# Altium PCB PCB2.PcbDoc
Units mil, origin at the board's own origin, x right, y up, seen from the top; angles counter-clockwise.
Board outline 6000 x 4000 mil, 2 copper layers (Top Layer, Bottom Layer); 176 components, 124 nets, 684 pads, 8 vias.
Unrouted connection lines stored in the file: 465.
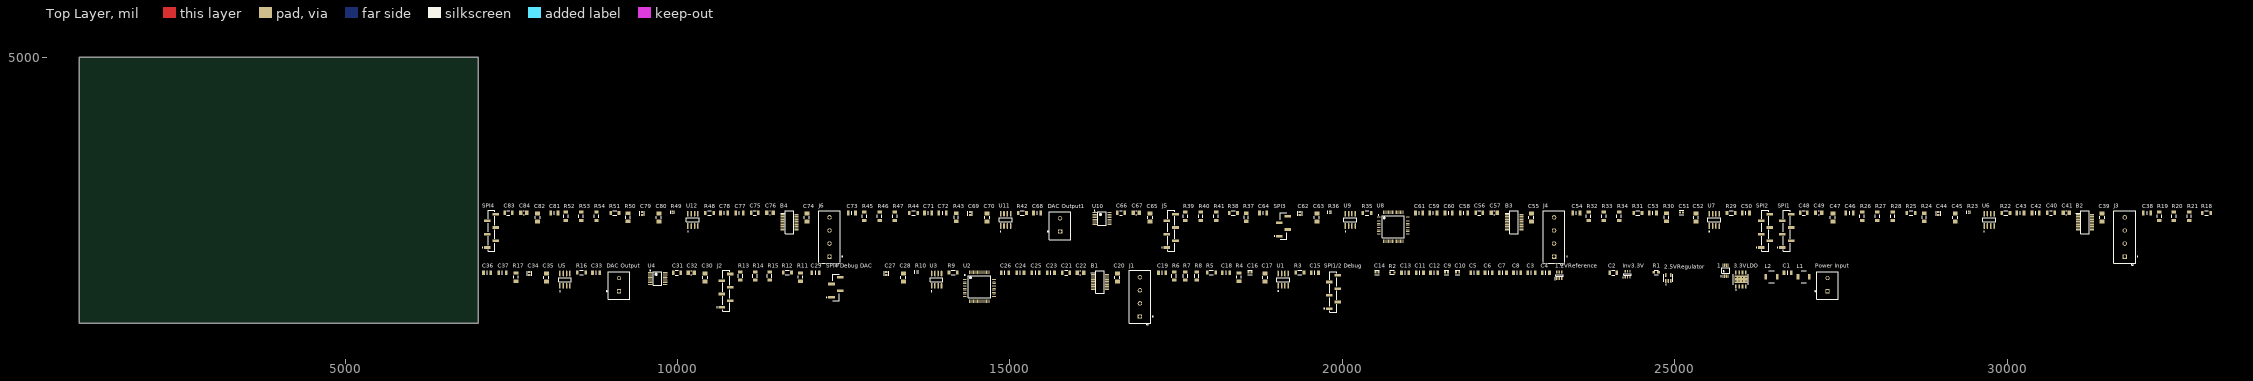
[diagram p0: Top Layer view]
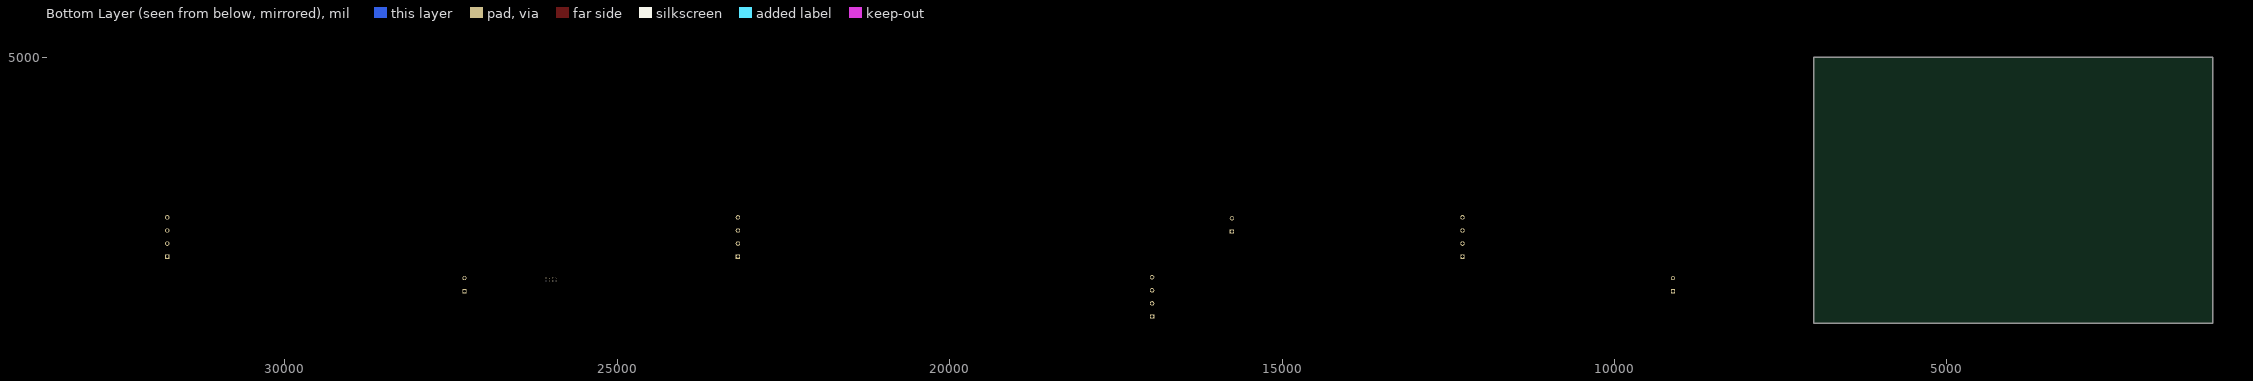
[diagram p1: Bottom Layer view, seen from below]

## Layer stack, top to bottom
Top Solder: solder mask 0.4, Solder Resist, Dk 3.5
Top Layer: signal copper 1.4
Dielectric 1: dielectric 12.6, FR-4, Dk 4.8
Bottom Layer: signal copper 1.4
Bottom Solder: solder mask 0.4, Solder Resist, Dk 3.5

## Board outline
1000,1000 7000,1000 7000,5000 1000,5000

## Design rules (kind name [scope] priority, off if disabled: settings)
Clearance [All] p1: gap=10 ignorepadtopadclearanceinfootprint=FALSE
PolygonConnect [All] p1: connectstyle=Relief reliefconductorwidth=10 reliefentries=4 polygonreliefangle="90 Angle" airgapwidth=10
RoutingVias [All] p1: holewidth=28 width=50 viastyle="Through Hole" minholewidth=28 minwidth=50 maxholewidth=28 maxwidth=50
SolderMaskExpansion [All] p1: expansion=4 istentingtop=FALSE
Width [All] p1: maxlimit=10 minlimit=10 preferedwidth=10
30 further rules are at their usual default settings.

## Components (designator, comment, footprint, x,y, rotation, side; value= is the part's Value field where it differs from the comment)
1 "LT1762EMS8-5#TRPBF" LT-MS8_L 25765,1790 r90 top
1.2VReference "REF35120QDBVR" SOT95P280X145-6N 23265,1720 r90 top
2.5VRegulator "ADP7142AUJZ-2.5-R7" FP-UJ-5-IPC_B 24905,1680 r90 top
3.3VLDO "TPS7B8633QDDARQ1" FP-DDA0008B-MFG 25995,1660 r90 top
B1 "AD7903BRQZ" SOP64P600X175-20N 16355,1620 r0 top
B2 "AD7903BRQZ" SOP64P600X175-20N 31170,2520 r0 top
B3 "AD7903BRQZ" SOP64P600X175-20N 22585,2520 r0 top
B4 "AD7903BRQZ" SOP64P600X175-20N 11685,2520 r0 top
C1 "1uF" CAPC3216X178N 26700,1760 r0 top
C2 "22pF" FP-C1206C-EB-MFG 24075,1760 r0 top value="22 pF"
C3 "10uF" CAPC3216X229N 22845,1760 r0 top
C4 "10uF" CAPC3216X229N 23060,1760 r0 top
C5 "10uF" CAPC3216X229N 21985,1760 r0 top
C6 "10uF" CAPC3216X229N 22200,1760 r0 top
C7 "1uF" CAPC3216X178N 22415,1760 r0 top
C8 "10uF" CAPC3216X229N 22630,1760 r0 top
C9 "0.01uF" FP-C0603C-CF-MFG 21565,1765 r0 top value="0.10 μF"
C10 "0.1uf" FP-C0603C-CF-MFG 21735,1765 r0 top value="0.10 μF"
C11 "10uF" CAPC3216X229N 21165,1760 r0 top
C12 "10uF" CAPC3216X229N 21380,1760 r0 top
C13 "1uF" CAPC3216X178N 20945,1760 r0 top
C14 "0.01uF" FP-C0603C-CF-MFG 20520,1765 r0 top value="0.10 μF"
C15 "10uF" CAPC3216X229N 19585,1760 r0 top
C16 "0.01uF" FP-C0603C-CF-MFG 18610,1765 r0 top value="0.10 μF"
C17 "2.7nF" FP-1206-L_3_2_0_2-W_1_6_0-IPC_A 18840,1690 r90 top
C18 "10uF" CAPC3216X229N 18250,1760 r0 top
C19 "10uF" CAPC3216X229N 17290,1760 r0 top
C20 "2.7nF" FP-1206-L_3_2_0_2-W_1_6_0-IPC_A 16615,1690 r90 top
C21 "3.9nF" FP-C1206C-EB-MFG 15845,1760 r0 top value="3,900 pF"
C22 "560pF" FP-GCM31B-0_2-IPC_C 16060,1760 r0 top
C23 "10uF" CAPC3216X229N 15615,1760 r0 top
C24 "10uF" CAPC3216X229N 15155,1760 r0 top
C25 "10uF" CAPC3216X229N 15385,1760 r0 top
C26 "10uF" CAPC3216X229N 14925,1760 r0 top
C27 "0.01uF" FP-C0603C-CF-MFG 13140,1750 r90 top value="0.10 μF"
C28 "2.7nF" FP-1206-L_3_2_0_2-W_1_6_0-IPC_A 13395,1690 r90 top
C29 "10uF" CAPC3216X229N 12075,1760 r0 top
C30 "2.7nF" FP-1206-L_3_2_0_2-W_1_6_0-IPC_A 10415,1690 r90 top
C31 "3.9nF" FP-C1206C-EB-MFG 9990,1760 r0 top value="3,900 pF"
C32 "560pF" FP-GCM31B-0_2-IPC_C 10205,1760 r0 top
C33 "10uF" CAPC3216X229N 8775,1760 r0 top
C34 "0.01uF" FP-C0603C-CF-MFG 7770,1750 r90 top value="0.10 μF"
C35 "2.7nF" FP-1206-L_3_2_0_2-W_1_6_0-IPC_A 8025,1690 r90 top
C36 "10uF" CAPC3216X229N 7135,1760 r0 top
C37 "10uF" CAPC3216X229N 7365,1760 r0 top
C38 "10uF" CAPC3216X229N 32105,2660 r0 top
C39 "2.7nF" FP-1206-L_3_2_0_2-W_1_6_0-IPC_A 31430,2590 r90 top
C40 "3.9nF" FP-C1206C-EB-MFG 30660,2660 r0 top value="3,900 pF"
C41 "560pF" FP-GCM31B-0_2-IPC_C 30890,2660 r0 top
C42 "10uF" CAPC3216X229N 30430,2660 r0 top
C43 "10uF" CAPC3216X229N 30200,2660 r0 top
C44 "0.01uF" FP-C0603C-CF-MFG 28965,2650 r90 top value="0.10 μF"
C45 "2.7nF" FP-1206-L_3_2_0_2-W_1_6_0-IPC_A 29220,2590 r90 top
C46 "10uF" CAPC3216X229N 27630,2660 r0 top
C47 "2.7nF" FP-1206-L_3_2_0_2-W_1_6_0-IPC_A 27380,2590 r90 top
C48 "3.9nF" FP-C1206C-EB-MFG 26940,2660 r0 top value="3,900 pF"
C49 "560pF" FP-GCM31B-0_2-IPC_C 27165,2660 r0 top
C50 "10uF" CAPC3216X229N 26070,2660 r0 top
C51 "0.01uF" FP-C0603C-CF-MFG 25100,2665 r0 top value="0.10 μF"
C52 "2.7nF" FP-1206-L_3_2_0_2-W_1_6_0-IPC_A 25320,2590 r90 top
C53 "10uF" CAPC3216X229N 24670,2660 r0 top
C54 "10uF" CAPC3216X229N 23520,2660 r0 top
C55 "2.7nF" FP-1206-L_3_2_0_2-W_1_6_0-IPC_A 22845,2590 r90 top
C56 "3.9nF" FP-C1206C-EB-MFG 22060,2660 r0 top value="3,900 pF"
C57 "560pF" FP-GCM31B-0_2-IPC_C 22285,2660 r0 top
C58 "10uF" CAPC3216X229N 21830,2660 r0 top
C59 "10uF" CAPC3216X229N 21370,2660 r0 top
C60 "10uF" CAPC3216X229N 21600,2660 r0 top
C61 "10uF" CAPC3216X229N 21155,2660 r0 top
C62 "0.01uF" FP-C0603C-CF-MFG 19360,2650 r90 top value="0.10 μF"
C63 "2.7nF" FP-1206-L_3_2_0_2-W_1_6_0-IPC_A 19615,2590 r90 top
C64 "10uF" CAPC3216X229N 18810,2660 r0 top
C65 "2.7nF" FP-1206-L_3_2_0_2-W_1_6_0-IPC_A 17110,2590 r90 top
C66 "3.9nF" FP-C1206C-EB-MFG 16670,2660 r0 top value="3,900 pF"
C67 "560pF" FP-GCM31B-0_2-IPC_C 16900,2660 r0 top
C68 "10uF" CAPC3216X229N 15410,2660 r0 top
C69 "0.01uF" FP-C0603C-CF-MFG 14400,2650 r90 top value="0.10 μF"
C70 "2.7nF" FP-1206-L_3_2_0_2-W_1_6_0-IPC_A 14655,2590 r90 top
C71 "10uF" CAPC3216X229N 13770,2660 r0 top
C72 "10uF" CAPC3216X229N 13985,2660 r0 top
C73 "10uF" CAPC3216X229N 12620,2660 r0 top
C74 "2.7nF" FP-1206-L_3_2_0_2-W_1_6_0-IPC_A 11945,2590 r90 top
C75 "3.9nF" FP-C1206C-EB-MFG 11160,2660 r0 top value="3,900 pF"
C76 "560pF" FP-GCM31B-0_2-IPC_C 11390,2660 r0 top
C77 "10uF" CAPC3216X229N 10930,2660 r0 top
C78 "10uF" CAPC3216X229N 10700,2660 r0 top
C79 "0.01uF" FP-C0603C-CF-MFG 9465,2650 r90 top value="0.10 μF"
C80 "2.7nF" FP-1206-L_3_2_0_2-W_1_6_0-IPC_A 9720,2590 r90 top
C81 "10uF" CAPC3216X229N 8145,2660 r0 top
C82 "2.7nF" FP-1206-L_3_2_0_2-W_1_6_0-IPC_A 7895,2590 r90 top
C83 "3.9nF" FP-C1206C-EB-MFG 7455,2660 r0 top value="3,900 pF"
C84 "560pF" FP-GCM31B-0_2-IPC_C 7685,2660 r0 top
"DAC Output" "282836-2" TECO-282836-2_V 9120,1580 r90 top
"DAC Output1" "282836-2" TECO-282836-2_V 15755,2480 r90 top
Inv3.3V "LT3462ES6#TRMPBF" LT-S6-6-TSOT-23_L 24290,1735 r90 top
J1 "282836-4" FP-282836-4-MFG 16955,1385 r90 top
J2 "M20-8770642R" FP-M20-8770642R-MFG 10730,1490 r90 top
J3 "282836-4" FP-282836-4-MFG 31770,2285 r90 top
J4 "282836-4" FP-282836-4-MFG 23185,2285 r90 top
J5 "M20-8770642R" FP-M20-8770642R-MFG 17425,2390 r90 top
J6 "282836-4" FP-282836-4-MFG 12285,2285 r90 top
L1 "22uH" FP-DEM4518C-MFG 26940,1700 r0 top
L2 "22uH" FP-DEM4518C-MFG 26455,1700 r0 top
"Power Input" "282836-2" TECO-282836-2_V 27300,1580 r90 top
R1 "267k" FP-RP731J-MFG 24720,1765 r0 top value=267KΩ
R2 "102k" FP-RT0603-MFG 20750,1765 r0 top value=102KΩ
R3 "33" FP-SR1206-MFG 19360,1760 r0 top value=33Ω
R4 "1.69k" RESC3216X60X45ML10T20 18445,1695 r90 top
R5 "33" FP-SR1206-MFG 18030,1760 r0 top value=33Ω
R6 "562" FP-RP732B-MFG 17470,1710 r90 top value=562Ω
R7 "562" FP-RP732B-MFG 17640,1710 r90 top value=562Ω
R8 "562" FP-RP732B-MFG 17810,1710 r90 top value=562Ω
R9 "33" FP-SR1206-MFG 14145,1760 r0 top value=33Ω
R10 "1 ohm precision" FP-AC0402-IPC_C 13595,1770 r90 top
R11 "1.69k" RESC3216X60X45ML10T20 11850,1695 r90 top
R12 "33" FP-SR1206-MFG 11650,1760 r0 top value=33Ω
R13 "562" FP-RP732B-MFG 10945,1710 r90 top value=562Ω
R14 "562" FP-RP732B-MFG 11165,1710 r90 top value=562Ω
R15 "562" FP-RP732B-MFG 11385,1710 r90 top value=562Ω
R16 "33" FP-SR1206-MFG 8555,1760 r0 top value=33Ω
R17 "1.69k" RESC3216X60X45ML10T20 7570,1695 r90 top
R18 "33" FP-SR1206-MFG 33000,2660 r0 top value=33Ω
R19 "562" FP-RP732B-MFG 32290,2610 r90 top value=562Ω
R20 "562" FP-RP732B-MFG 32510,2610 r90 top value=562Ω
R21 "562" FP-RP732B-MFG 32740,2610 r90 top value=562Ω
R22 "33" FP-SR1206-MFG 29980,2660 r0 top value=33Ω
R23 "1 ohm precision" FP-AC0402-IPC_C 29420,2670 r90 top
R24 "1.69k" RESC3216X60X45ML10T20 28755,2595 r90 top
R25 "33" FP-SR1206-MFG 28555,2660 r0 top value=33Ω
R26 "562" FP-RP732B-MFG 27820,2610 r90 top value=562Ω
R27 "562" FP-RP732B-MFG 28050,2610 r90 top value=562Ω
R28 "562" FP-RP732B-MFG 28280,2610 r90 top value=562Ω
R29 "33" FP-SR1206-MFG 25850,2660 r0 top value=33Ω
R30 "1.69k" RESC3216X60X45ML10T20 24875,2595 r90 top
R31 "33" FP-SR1206-MFG 24445,2660 r0 top value=33Ω
R32 "562" FP-RP732B-MFG 23705,2610 r90 top value=562Ω
R33 "562" FP-RP732B-MFG 23935,2610 r90 top value=562Ω
R34 "562" FP-RP732B-MFG 24165,2610 r90 top value=562Ω
R35 "33" FP-SR1206-MFG 20370,2660 r0 top value=33Ω
R36 "1 ohm precision" FP-AC0402-IPC_C 19810,2670 r90 top
R37 "1.69k" RESC3216X60X45ML10T20 18555,2595 r90 top
R38 "33" FP-SR1206-MFG 18360,2660 r0 top value=33Ω
R39 "562" FP-RP732B-MFG 17640,2610 r90 top value=562Ω
R40 "562" FP-RP732B-MFG 17870,2610 r90 top value=562Ω
R41 "562" FP-RP732B-MFG 18100,2610 r90 top value=562Ω
R42 "33" FP-SR1206-MFG 15185,2660 r0 top value=33Ω
R43 "1.69k" RESC3216X60X45ML10T20 14190,2595 r90 top
R44 "33" FP-SR1206-MFG 13550,2660 r0 top value=33Ω
R45 "562" FP-RP732B-MFG 12810,2610 r90 top value=562Ω
R46 "562" FP-RP732B-MFG 13040,2610 r90 top value=562Ω
R47 "562" FP-RP732B-MFG 13270,2610 r90 top value=562Ω
R48 "33" FP-SR1206-MFG 10480,2660 r0 top value=33Ω
R49 "1 ohm precision" FP-AC0402-IPC_C 9920,2670 r90 top
R50 "1.69k" RESC3216X60X45ML10T20 9255,2595 r90 top
R51 "33" FP-SR1206-MFG 9055,2660 r0 top value=33Ω
R52 "562" FP-RP732B-MFG 8320,2610 r90 top value=562Ω
R53 "562" FP-RP732B-MFG 8550,2610 r90 top value=562Ω
R54 "562" FP-RP732B-MFG 8780,2610 r90 top value=562Ω
SPI1 "M20-8770642R" FP-M20-8770642R-MFG 26685,2390 r90 top
"SPI1/2 Debug" "M20-8770642R" FP-M20-8770642R-MFG 19865,1470 r90 top
SPI2 "M20-8770642R" FP-M20-8770642R-MFG 26365,2390 r90 top
SPI3 "M20-8770446" M208770446 19115,2460 r90 top
SPI4 "M20-8770642R" FP-M20-8770642R-MFG 7200,2390 r90 top
"SPI4 Debug DAC" "M20-8770446" M208770446 12380,1540 r90 top
U1 "ADA4941-1YRZ-R7" FP-R-8-IPC_B 19110,1655 r90 top
U2 "PIC32MZ2048EFG064-I/PT" FP-C04-085-PT-IPC_C 14540,1550 r0 top
U3 "ADA4941-1YRZ-R7" FP-R-8-IPC_B 13895,1655 r90 top
U4 "AD5686RBRUZ" RU-16_N 9700,1675 r0 top
U5 "ADA4941-1YRZ-R7" FP-R-8-IPC_B 8305,1655 r90 top
U6 "ADA4941-1YRZ-R7" FP-R-8-IPC_B 29730,2555 r90 top
U7 "ADA4941-1YRZ-R7" FP-R-8-IPC_B 25595,2555 r90 top
U8 "PIC32MZ2048EFG064-I/PT" FP-C04-085-PT-IPC_C 20765,2450 r0 top
U9 "ADA4941-1YRZ-R7" FP-R-8-IPC_B 20120,2555 r90 top
U10 "AD5686RBRUZ" RU-16_N 16385,2575 r0 top
U11 "ADA4941-1YRZ-R7" FP-R-8-IPC_B 14935,2555 r90 top
U12 "ADA4941-1YRZ-R7" FP-R-8-IPC_B 10230,2555 r90 top

## Footprints (in the part's own frame and the unit in brackets; to place one, negate y for a bottom-side part, rotate by r counter-clockwise, add the part's x,y. Pads: shape width x height; smd on the part's side, far side on the other; paste and mask are expansions set on the pad)
CAPC3216X178N [mm]
  rect 1.02x1.82 smd: 1(-1.4,0) 2(1.4,0)
  silkscreen extent 0,-0.7 0,0.7
CAPC3216X229N [mm]
  rect 1.02x1.82 smd: 1(-1.4,0) 2(1.4,0)
  silkscreen extent 0,-0.7 0,0.7
FP-1206-L_3_2_0_2-W_1_6_0-IPC_A [mil]
  rect 59.24x75.05 smd paste+0 mask+0: 1(-59.09,0) 2(59.09,0)
  silkscreen extent -18,-38 18,38, body extent -108,-57 108,57, height 10
FP-282836-4-MFG [mm]
  rect 1.7x1.7 hole 1.1 paste-2539.97 mask+0: 1(-7.2,0)
  round 1.7 hole 1.1 paste-2539.97 mask+0: 2(-2.2,0) 3(2.8,0) 4(7.8,0)
  silkscreen extent -10.43,-5 10.43,4.18, body extent -10.52,-4.28 10.53,4.28, height 0.25
FP-AC0402-IPC_C [mil]
  rect 20.29x18.6 smd paste+0 mask+0: 1(-14.9,0) 2(14.9,0)
  silkscreen extent -25,-27 25,27, body extent -29,-15 29,15, height 10
FP-C04-085-PT-IPC_C [mm]
  rect 1.355x0.212 smd paste+0 mask+0: 1(-5.575,3.75)
  rrect100% 1.355x0.212 smd paste+0 mask+0: 2(-5.575,3.25) 3(-5.575,2.75) 4(-5.575,2.25) 5(-5.575,1.75) 6(-5.575,1.25) 7(-5.575,0.75) 8(-5.575,0.25) 9(-5.575,-0.25) 10(-5.575,-0.75) 11(-5.575,-1.25) 12(-5.575,-1.75) 13(-5.575,-2.25) 14(-5.575,-2.75) 15(-5.575,-3.25) 16(-5.575,-3.75) 33(5.575,-3.75) 34(5.575,-3.25) 35(5.575,-2.75) 36(5.575,-2.25) 37(5.575,-1.75) 38(5.575,-1.25) 39(5.575,-0.75) 40(5.575,-0.25) 41(5.575,0.25) 42(5.575,0.75) 43(5.575,1.25) 44(5.575,1.75) 45(5.575,2.25) 46(5.575,2.75) 47(5.575,3.25) 48(5.575,3.75)
  rrect100% 0.212x1.355 smd paste+0 mask+0: 17(-3.75,-5.575) 18(-3.25,-5.575) 19(-2.75,-5.575) 20(-2.25,-5.575) 21(-1.75,-5.575) 22(-1.25,-5.575) 23(-0.75,-5.575) 24(-0.25,-5.575) 25(0.25,-5.575) 26(0.75,-5.575) 27(1.25,-5.575) 28(1.75,-5.575) 29(2.25,-5.575) 30(2.75,-5.575) 31(3.25,-5.575) 32(3.75,-5.575) 49(3.75,5.575) 50(3.25,5.575) 51(2.75,5.575) 52(2.25,5.575) 53(1.75,5.575) 54(1.25,5.575) 55(0.75,5.575) 56(0.25,5.575) 57(-0.25,5.575) 58(-0.75,5.575) 59(-1.25,5.575) 60(-1.75,5.575) 61(-2.25,5.575) 62(-2.75,5.575) 63(-3.25,5.575) 64(-3.75,5.575)
  silkscreen extent -5.7,-4.25 4.25,4.58, body extent -6.35,-6.35 6.35,6.35, height 0.25
FP-C0603C-CF-MFG [mm]
  rect 0.75x0.9 smd paste+0 mask+0: 1(-0.6,0) 2(0.6,0)
  silkscreen extent -0.87,-0.85 0.88,0.85, body extent -1.2,-0.6 1.2,0.6, height 0.25
FP-C1206C-EB-MFG [mm]
  rect 0.95x1.7 smd paste+0 mask+0: 1(-1.4,0) 2(1.4,0)
  silkscreen extent -0.55,-0.9 0.55,0.9, body extent -2,-1 2,1, height 0.25
FP-DDA0008B-MFG [mm]
  rrect17% 1.55x0.6 smd paste+0 mask+0: 1(-2.7,1.905) 2(-2.7,0.635) 3(-2.7,-0.635) 4(-2.7,-1.905) 5(2.7,-1.905) 6(2.7,-0.635) 7(2.7,0.635) 8(2.7,1.905)
  rrect3% 2.95x4.9 smd paste-1000 mask-1000: 9(0,0)
  silkscreen extent -4.15,-2.83 2,2.83, body extent -3.57,-2.75 3.57,2.75, height 0.25
FP-DEM4518C-MFG [mm]
  rect 1x2.2 smd paste+0 mask+0: 1(-2.15,0) 2(2.15,0)
  silkscreen extent -1,-2.35 1,2.35, body extent -2.75,-2.45 2.75,2.45, height 0.25
FP-GCM31B-0_2-IPC_C [mil]
  rect 51.35x67.17 smd paste+0 mask+0: 1(-47.28,0) 2(47.28,0)
  silkscreen extent -7,-31 7,31, body extent -77,-39 77,39, height 10
FP-M20-8770642R-MFG [mm]
  rect 1x2.51 smd paste+0 mask+0: 1(-6.35,1.655) 2(-3.81,-1.655) 3(-1.27,1.655) 4(1.27,-1.655) 5(3.81,1.655) 6(6.35,-1.655)
  silkscreen extent -7.8,-1.33 7.8,3.6, body extent -7.9,-3.01 7.9,3.01, height 0.25
FP-R-8-IPC_B [mil]
  rect 85.59x22.92 smd paste+0 mask+0: 1(-93.15,75)
  rrect100% 85.59x22.92 smd paste+0 mask+0: 2(-93.15,25) 3(-93.15,-25) 4(-93.15,-75) 5(93.15,-75) 6(93.15,-25) 7(93.15,25) 8(93.15,75)
  silkscreen extent -178,-96 31,96, body extent -146,-106 146,106, height 10
FP-RP731J-MFG [mm]
  rect 1x0.9 smd paste+0 mask+0: 1(-0.9,0) 2(0.9,0)
  silkscreen extent -0.77,-0.82 0.77,0.82, body extent -1.5,-0.55 1.5,0.55, height 0.25
FP-RP732B-MFG [mm]
  rect 1.15x1.7 smd paste+0 mask+0: 1(-1.575,0) 2(1.575,0)
  silkscreen extent -0.63,-0.85 0.63,0.85, body extent -2.25,-0.95 2.25,0.95, height 0.25
FP-RT0603-MFG [mm]
  rect 0.9x0.8 smd paste+0 mask+0: 1(-0.85,0) 2(0.85,0)
  silkscreen extent -0.85,-0.81 0.86,0.8, body extent -1.4,-0.55 1.4,0.55, height 0.25
FP-SR1206-MFG [mm]
  rect 1x1.5 smd paste+0 mask+0: 1(-1.6,0) 2(1.6,0)
  silkscreen extent -0.72,-0.85 0.72,0.85, body extent -2.2,-0.95 2.2,0.95, height 0.25
FP-UJ-5-IPC_B [mm]
  rect 1.554x0.572 smd paste+0 mask+0: 1(-1.1,0.95)
  rrect100% 1.554x0.572 smd paste+0 mask+0: 2(-1.1,0) 3(-1.1,-0.95) 4(1.1,-0.95) 5(1.1,0.95)
  silkscreen extent -2.65,-1.7 1.4,1.7, body extent -2.13,-1.7 2.13,1.7, height 0.25
LT-MS8_L [mm] "SOP, 8-Leads, Body 3x3mm, Pitch 0.65mm, IPC High Density"
  oval 1.3x0.45 smd: 1(-2.1,0.975) 2(-2.1,0.325) 3(-2.1,-0.325) 4(-2.1,-0.975) 5(2.1,-0.975) 6(2.1,-0.325) 7(2.1,0.325) 8(2.1,0.975)
  silkscreen extent -2.22,-1.55 1.05,1.87, body extent -1.55,-1.55 1.55,1.55, height 1.1
LT-S6-6-TSOT-23_L [mm] "SOT23, 6-Leads, Body 2.9x1.75mm, Pitch 0.95mm, IPC High Density"
  rect 1x0.55 smd: 1(-1.15,0.95) 2(-1.15,0) 3(-1.15,-0.95) 4(1.15,-0.95) 5(1.15,0) 6(1.15,0.95)
  silkscreen extent -1.27,-1.45 0.25,1.9, body extent -0.87,-1.45 0.87,1.45, height 1
M208770446 [mm]
  rect 1x2.51 smd: 1(-3.81,1.655) 2(-1.27,-1.655) 3(1.27,1.655) 4(3.81,-1.655)
  silkscreen extent -5.08,-1.25 5.08,3.6
RESC3216X60X45ML10T20 [mm] "Chip Resistor, 2-Leads, Body 3.20x1.60mm, IPC Low Density"
  rect 1.3x1.8 smd: 1(-1.55,0) 2(1.55,0)
  silkscreen extent -0.5,-0.8 0.5,0.8, body extent -1.65,-0.85 1.65,0.85, height 0.6
RU-16_N [mm] "TSOP, 16-Leads, Body 5x4.4mm, Pitch 0.65mm, IPC Medium Density"
  oval 1.7x0.35 smd: 1(-2.85,2.275) 2(-2.85,1.625) 3(-2.85,0.975) 4(-2.85,0.325) 5(-2.85,-0.325) 6(-2.85,-0.975) 7(-2.85,-1.625) 8(-2.85,-2.275) 9(2.85,-2.275) 10(2.85,-1.625) 11(2.85,-0.975) 12(2.85,-0.325) 13(2.85,0.325) 14(2.85,0.975) 15(2.85,1.625) 16(2.85,2.275)
  silkscreen extent -2.97,-2.55 1.6,3.12, body extent -2.25,-2.55 2.25,2.55, height 1.2
SOP64P600X175-20N [mm]
  rect 1.52x0.44 smd: 1(-2.715,2.88) 2(-2.715,2.24) 3(-2.715,1.6) 4(-2.715,0.96) 5(-2.715,0.32) 6(-2.715,-0.32) 7(-2.715,-0.96) 8(-2.715,-1.6) 9(-2.715,-2.24) 10(-2.715,-2.88) 11(2.715,-2.88) 12(2.715,-2.24) 13(2.715,-1.6) 14(2.715,-0.96) 15(2.715,-0.32) 16(2.715,0.32) 17(2.715,0.96) 18(2.715,1.6) 19(2.715,2.24) 20(2.715,2.88)
  silkscreen extent -3.47,-4.33 1.61,4.33
SOT95P280X145-6N [mm]
  rect 1.2x0.6 smd: 1(-1.25,0.95) 2(-1.25,0) 3(-1.25,-0.95) 4(1.25,-0.95) 5(1.25,0) 6(1.25,0.95)
  silkscreen extent -1.85,-1.45 0.3,1.6
TECO-282836-2_V [mm] "Female Header, Pitch 5mm, 1 x 2 Position, Height 10mm"
  rect 1.6x1.6 hole 1.1: 1(-2.5,0)
  round 1.6 hole 1.1: 2(2.5,0)
  silkscreen extent -5.6,-4.1 5,4.87, body extent -5.6,-4.1 5,4.1, height 10

## Part data
1: library part CMP-0476-00706-1, "150 mA, Low Noise, LDO Micropower Regulator, 1.8 to 20 V Vin, 5 V Vout, 8-pin SOP (MS8-8), -40 to 125 degC, Pb-Free, Tape and Reel", Dropout Voltage(V)=0.27, Manufacturer="Linear Technology", Output Voltage="5 V", Shutdown Current(uA)=1, ComponentLink1Description="Manufacturer URL", ComponentLink1URL=http://www.linear.com/, ComponentLink2Description=Datasheet, ComponentLink2URL=http://cds.linear.com/docs/en/datasheet/1762fa.pdf, ComponentLink3Description="Package Specification", ComponentLink3URL=http://cds.linear.com/docs/en/packaging/05081660_G_MS8.pdf, DatasheetVersion="Rev. A", Discrete Pass Element=no, Iout(mA)=150, Isupply(mA)=0.025, Mounting Technology="Surface Mount", Noise(uV)=20, Number of Outputs=1, PackageDescription="8-Pin Plastic MSOP, Body 3 x 3 mm, Pitch 0.65 mm", PackageReference=MS8, PackageVersion="Rev. G, 05/2013", Packing="Tape and Reel", PartNumber=LT1762EMS8-5#TRPBF, PSRR(dB)=65, RoHS=TRUE, Vin Max(V)=20, Vin Min(V)=1.8
1.2VReference: "Voltage References 650-nA quiescent current, 12-ppm/C drift, ultra-low-power precision voltage reference", Manufacturer_Name="Texas Instruments", Mouser Part Number=595-REF35120QDBVR, Datasheet Link=https://www.ti.com/lit/ds/symlink/ref35.pdf?HQS=dis-mous-null-mousermode-dsf-pf-null-wwe&ts=1691289769260&ref_url=https%253A%252F%252Fwww.mouser.kr%252F, Geometry.Height=1.45mm, Manufacturer_Part_Number=REF35120QDBVR, Mouser Price/Stock=https://www.mouser.co.uk/ProductDetail/Texas-Instruments/REF35120QDBVR?qs=IPgv5n7u5QaqWPuhqB4rXA%3D%3D
2.5VRegulator: library part CMP-09138-000287-1, "IC REG LIN 2.5V 200MA TSOT23-5", Case/Package=SOT-23-5, Dropout Voltage=200mV, Input Bias Current=1uA, Max Input Voltage=40V, Max Operating Temperature=125°C, Max Output Current=200mA, Max Supply Current=320uA, Min Current Limit=250mA, Min Input Voltage=2.7V, Min Operating Temperature=-40°C, Min Output Voltage=2.5V, Operating Supply Current=180uA, Package Quantity=3000, Power Supply Rejection Ratio (PSRR)=88dB, Quiescent Current=140uA, Accuracy=0.8%, Contact Plating=Gold, Lead Free="Contains Lead", Mount="Surface Mount", Number of Outputs=1, Number of Pins=5, Number of Regulators=1, Output Configuration=Positive, Output Current=200mA, Output Type=Fixed, Output Voltage=2.5V, Packaging="Tape and Reel", Polarity=Positive, RoHS Compliant=Yes, Series=-
3.3VLDO: library part CMP-00370-110297362-1, "TPS7B8633QDDARQ1 Automotive 500-mA, 40-V, ultra-low-IQ, low-dropout (LDO) linear regulator with power good", Manufacturer Lifecycle Status=ACTIVE, Height=1.7mm, Length=4.89mm, Lifecycle Status=Production, NexarPartId=110297362, Number of Pins=8, Thickness=1.48mm, Width=3.9mm
B1 B2 B3 B4: "Analog Devices AD7903BRQZ, 16 bit Serial ADC, Dual Differential Input, 20-Pin QSOP", Manufacturer_Name="Analog Devices", Mouser Part Number=584-AD7903BRQZ, Datasheet Link=http://www.analog.com/media/en/technical-documentation/data-sheets/AD7903.pdf, Geometry.Height=1.75mm, Manufacturer_Part_Number=AD7903BRQZ, Mouser Price/Stock=https://www.mouser.co.uk/ProductDetail/Analog-Devices/AD7903BRQZ?qs=8qEfIxKlfRm3RPIr8yiqwg%3D%3D
C1 C7 C13: library part KAF31GR72A105KL, "Multilayer Ceramic Capacitors MLCC - SMD/SMT 100V 1uF X7R 1206 10% AEC-Q200 FLEXITERM", Manufacturer_Name="Kyocera AVX", Mouser Part Number=581-KAF31GR72A105KL, Geometry.Height=1.78mm, Manufacturer_Part_Number=KAF31GR72A105KL, Mouser Price/Stock=https://www.mouser.co.uk/ProductDetail/KYOCERA-AVX/KAF31GR72A105KL?qs=Jm2GQyTW%2FbirKGVNOlRzqw%3D%3D
C2: library part CMP-1037-00978-2, "1206 22pF Ceramic Multilayer Capacitor; 50VDC; 125degC; C0G Dielec; +/-5% SMD", Capacitance="22 pF", Manufacturer=KEMET, Manufacturer Part Number=C1206C220J5GACTU, Package=C1206C-EB, Temperature="-55°C to +150°C", Temperature Characteristic=C0G, Temperature Coefficient=15%, Temperature Range High=+150°C, Temperature Range Low=-55°C, Tolerance=0.05, Voltage Rating="50 V", Automotive=Yes, Automotive Grade="Grade 0", Category=Cap, ComponentLink2Description=Datasheet, ComponentLink2URL=https://content.kemet.com/datasheets/KEM_C1007_X8R_ULTRA_150C_SMD.pdf, Device Class L1="Passive Components", Device Class L2=Capacitors, Device Class L3="Ceramic Capacitors", Digikey Description="1206 22pF Ceramic Multilayer Capacitor; 50VDC; 125degC; C0G Dielec; +/-5% SMD", Height=0.88mm, Ipc Land Pattern Name=CAPC320160X78, Lead Free=Yes, Material=Ceramic, Mouser Description="1206 22pF Ceramic Multilayer Capacitor; 50VDC; 125degC; C0G Dielec; +/-5% SMD", Octopart=https://octopart.com/c1206c220j5gactu-kemet-131912, RoHS=TRUE
C3 C4 C5 C6 C8 C11 C12 C15 C18 C19 C23 C24 C25 C26 C29 C33 C36 C37 C38 C42 C43 C46 C50 C53 C54 C58 C59 C60 C61 C64 C68 C71 C72 C73 C77 C78 C81: library part 1206DD106MAT2A, "Multilayer Ceramic Capacitors MLCC - SMD/SMT 35V 10uF X5R 1206 20%", Manufacturer_Name="Kyocera AVX", Mouser Part Number=581-1206DD106MAT2A, Geometry.Height=2.29mm, Manufacturer_Part_Number=1206DD106MAT2A, Mouser Price/Stock=https://www.mouser.co.uk/ProductDetail/KYOCERA-AVX/1206DD106MAT2A?qs=lhAPX%252BE7qEaaGz%2FHFoBa1A%3D%3D
C9 C10 C14 C16 C27 C34 C44 C51 C62 C69 C79: library part CMP-2006-03061-2, "CAP CER 0.1UF 50V X7R 0603", Capacitance="0.10 μF", Manufacturer=KEMET, Manufacturer Part Number=C0603C104K5RACTU, Package=C0603C-CF, Temperature="-55°C to +125°C", Temperature Characteristic=X7R, Temperature Coefficient=30ppm/°C, Temperature Range High=+125°C, Temperature Range Low=-55°C, Tolerance=0.1, Voltage Rating="50 V", Automotive=Yes, Automotive Grade="Grade 1", Category=Cap, ComponentLink2Description=Datasheet, ComponentLink2URL=https://api.kemet.com/component-edge/download/datasheet/C0603C100J5GACAUTO.pdf, Device Class L1="Passive Components", Device Class L2=Capacitors, Device Class L3="Ceramic Capacitors", Digikey Description="CAP CER 0.1UF 50V X7R 0603", Height=0.87mm, Lead Free=Yes, Material=Ceramic, Octopart=https://octopart.com/c0603c104k5ractu-kemet-139244, RoHS=TRUE
C17 C20 C28 C30 C35 C39 C45 C47 C52 C55 C63 C65 C70 C74 C80 C82: library part CMP-04427-005956-1, "General Purpose Ceramic Capacitor, 1206, 2.7nF, 2%, NP0, 30ppm/°C, 50V", Case Code (Imperial)=1206, Case Code (Metric)=3216, Dielectric=C0G, Max Operating Temperature=125°C, Min Operating Temperature=-55°C, Package Quantity=2000, Tolerance=2%, Voltage Rating=50V, Capacitance=2.7nF, Case/Package=1206, Construction=Flat, Depth=1.6mm, Height=0.5mm, Length=3.2mm, Mount="Surface Mount", Packaging="Tape and Reel", Radiation Hardening=No, RoHS Compliant=Yes, Termination=SMD/SMT, Thickness=0.05inch, Voltage Rating (DC)=50V, Width=0.063inch
C21 C31 C40 C48 C56 C66 C75 C83: library part CMP-1037-03025-3, "CAP CER 3900PF 50V 1% NP0 1206", Capacitance="3,900 pF", Manufacturer=KEMET, Manufacturer Part Number=C1206C392F5GACTU, Package=C1206C-EB, Temperature="-55°C to +150°C", Temperature Characteristic=C0G, Temperature Coefficient=15%, Temperature Range High=+150°C, Temperature Range Low=-55°C, Tolerance=0.01, Voltage Rating="50 V", Automotive=Yes, Automotive Grade="Grade 0", Category=Cap, ComponentLink2Description=Datasheet, ComponentLink2URL=https://content.kemet.com/datasheets/KEM_C1007_X8R_ULTRA_150C_SMD.pdf, Device Class L1="Passive Components", Device Class L2=Capacitors, Device Class L3="Ceramic Capacitors", Digikey Description="CAP CER 3900PF 50V 1% NP0 1206", Height=0.88mm, Ipc Land Pattern Name=CAPC320160X78, Lead Free=Yes, Material=Ceramic, Mouser Description="Multilayer Ceramic Capacitors MLCC - SMD/SMT 50volts 3900pF C0G 1%", Octopart=https://octopart.com/c1206c392f5gactu-kemet-12595535, RoHS=TRUE
C22 C32 C41 C49 C57 C67 C76 C84: library part CMP-06035-046423-1, "Ceramic Capacitor for Automotive 560pF ±1% 1kVDC C0G 1206 Embossed T/R"
"DAC Output" "DAC Output1" "Power Input": library part CMP-1684-00017-1, "Female Header, Pitch 5 mm, 1 x 2 Position, Height 10 mm, Tail Length 3.5 mm, Rohs, Bulk", Color=Green, Current=13.5A, Manufacturer="TE Connectivity", Package Description="Female Header, Pitch 5 mm, 1 x 2 Position, Height 10 mm, Tail Length 3.5 mm", Package Reference=THD, Standard Package=300, Voltage=300V, 3D Model=282836-2.pdf, Category=Connectors,Interconnects, Clamp Material - Plating=Brass-NickelPlated, Contact Material - Plating=Brass-TinPlated, Datasheet URL=http://www.te.com.cn/commerce/DocumentDelivery/DDEController?Action=showdoc&DocId=Catalog+Section%7F1308389_EUROSTYLE_TERMINAL_BLOCKS%7F0607%7Fpdf%7FEnglish%7FENG_CS_1308389_EUROSTYLE_TERMINAL_BLOCKS_0607.pdf%7F282836-2, Dynamic Catalog=BuchananSeries, Family=TerminalBlocks-WiretoBoard, Featured Product=EurostyleTerminalBlockConnectors, Features=Interlocking(Side), Housing Material=Polyamide(PA66),Nylon6/6, Manufacturer URL=http://www.te.com, Mating Orientation=HorizontalwithBoard, Mounting Type=ThroughHole, Number of Levels=1, Other Names="5ULV-02B / A98076", Packaging=Bulk, Pitch="0.197\"(5.00mm)", Positions Per Level=2, Product Training Modules=Wire-to-BoardEurostyleTerminalBlocks, RoHS Information=282836-2StatementofCompliance, Screw Material - Plating=Brass-NickelPlated, Screw Thread=M3, Series=Buchanan, Torque - Screw=0.68Nm(6Lb-In), Wire Gauge=16-30AWG, Wire Termination=Screw-RisingCageClamp
Inv3.3V: library part CMP-0491-01714-1, "Inverting 1.2 MHz DC/DC Converter with Integrated Schottky MAX, 6-pin SOT23 (S6-6), -40 to 85 degC, Pb-Free, Mini Tape and Reel", Manufacturer="Linear Technology", Code_JEDEC=MO-193, ComponentLink1Description="Manufacturer URL", ComponentLink1URL=http://www.linear.com/, ComponentLink2Description=Datasheet, ComponentLink2URL=http://cds.linear.com/docs/en/datasheet/3462af.pdf, ComponentLink3Description="Package Specification", ComponentLink3URL=http://cds.linear.com/docs/en/packaging/SOT_6_05-08-1636.pdf, Mounting Technology="Surface Mount", Number of Outputs=1, PackageDescription="6-Pin Plastic TSOT-23, Body 2.9 x 1.63 mm, Pitch 0.95 mm", PackageReference=S6-6, PackageVersion=Jun-10, Packing="Mini Tape and Reel", PartNumber=LT3462ES6#TRMPBF, RoHS=TRUE
J1 J3 J4 J6: library part CMP-03790-46505329-1, "282836-4 Connector, Terminal Block; Wire Receptacle; 4 Pos.; 16-30 AWG; 0.197 in. CL; Sid", Color=Green, Current=13.5A, Flammability Rating="UL94 V-0", Manufacturer Lifecycle Status=ACTIVE, Max Supply Voltage (AC)=300V, Voltage Rating (AC)=250V, Approvals=UL, Connector System=Wire-to-Board, Connector Type=Receptacle, Contact Material=Brass, Contact Plating=Tin, Current Rating=13.5A, Depth=8.2mm, ELV=Compliant, Housing Color=Green, Housing Material=Polyamide, Lead Free="Lead Free", Lead Pitch=5mm, Length=20mm, Lifecycle Status=Production, Max Current Rating=13.5A, Max Voltage Rating (AC)=300V, Mount="Through Hole", NexarPartId=46505329, Number of Circuits=4, Number of Contacts=4, Number of Levels=1, Number of Poles=4, Number of Positions=4, Number of Positions Per Level=4, Number of Rows=1, Operating Supply Voltage=300V, Orientation=Straight, Packaging=Bulk, Pitch=5mm, Plating=Brass, Radiation Hardening=No, REACH SVHC=Unknown, RoHS=Compliant, Tail Length=3.5mm, Termination="Screw, Solder", Thread Size=M3, Voltage=300V, Voltage Rating=300V, Voltage Rating (DC)=250V, Width=10mm, Wire Gauge (Max)=30AWG, Wire Gauge (Min)=30AWG
J2 J5 SPI1 "SPI1/2 Debug" SPI2 SPI4: library part CMP-15831-000020-1, "CONN HEADER SMD 6POS 2.54MM", Case/Package=SIL, Contact Resistance=30mR, Housing Color=Black, Max Current Rating=3A, Max Operating Temperature=105°C, Min Operating Temperature=-40°C, Contact Material=Brass, Contact Plating=Gold, Depth=2.54mm, Gender=Male, Housing Material=Nylon, Length=15.24mm, Number of Contacts=6, Number of Rows=1, Orientation=Straight, Packaging="Tape and Reel", Pitch=2.54mm, Termination=Solder
L1 L2: library part CMP-06042-016273-1, "FIXED IND", Case/Package=Nonstandard, Current Rating=1A, DC Resistance (DCR)=306mR, Max Operating Temperature=85°C, Min Operating Temperature=-40°C, Resistor Type=Wirewound, Saturation Current=910mA, Test Frequency=100kHz, Tolerance=20%, Core Material=Ferrite, Height - Seated (Max)=0.071inch, Inductance=22uH, Length=0.185inch, Mount="Surface Mount", Packaging="Tape and Reel", RoHS Compliant=Yes, Shielding=Shielded, Width=0.177inch
R1: library part CMP-03211-009755-1, "TE CONNECTIVITY / HOLSWORTHY SMD Chip Resistor, Thin Film, 267KΩ, 50 V, 0603 [1608 Metric], 100 mW, 0.1% , RP73 Series", Manufacturer="TE Connectivity", Manufacturer Part Number=RP73D1J267KBTDG, Package=RP731J, Power Rating=0.1W, Resistance=267KΩ, Temperature="-55°C to +105°C", Temperature Coefficient=15ppm/°C, Temperature Range High=+105°C, Temperature Range Low=-55°C, Tolerance=0.1%, Voltage Rating=75V, Automotive=No, Category=Res, ComponentLink2Description=Datasheet, ComponentLink2URL=https://www.te.com/commerce/DocumentDelivery/DDEController?Action=srchrtrv&DocNm=1773272&DocType=DS&DocLang=English, Composition="Thin Film", Device Class L1="Passive Components", Device Class L2=Resistors, Device Class L3="Chip SMD Resistors", Height=0.55mm, Ipc Land Pattern Name=RESC15580X45, Lead Free=Yes, Octopart=https://octopart.com/rp73d1j267kbtdg-te+connectivity-42631794, octopart_url=https://octopart.com/rp73d1j267kbtdg-te+connectivity-42631794, Packaging="cut tape", RoHS=TRUE, Series=RP73
R2: library part CMP-03412-022171-1, "RES SMD 102K OHM 0.5% 1/10W 0603", Manufacturer=Yageo, Manufacturer Part Number=RT0603DRD07102KL, Package=RT0603, Power Rating=0.1W, Resistance=102KΩ, Temperature="-55°C to +155°C", Temperature Coefficient="25 ppm/°C", Temperature Range High=+155°C, Temperature Range Low=-55°C, Tolerance=0.005, Voltage Rating=75V, Automotive=No, Category=Res, ComponentLink2Description=Datasheet, ComponentLink2URL=http://www.yageo.com/documents/recent/PYu-RT_1-to-0.01_RoHS_L_9.pdf, Composition="Thin Film", Device Class L1="Passive Components", Device Class L2=Resistors, Device Class L3="Chip SMD Resistors", Digikey Description="RES SMD 102K OHM 0.5% 1/10W 0603", Footprint Url=http://www.yageo.com/exep/pages/download/literatures/PYu-R_Mount_10.pdf, Height=0.55mm, Ipc Land Pattern Name=RESC16080X45, Lead Free=Yes, Octopart=https://octopart.com/rt0603drd07102kl-yageo-1167904, RoHS=TRUE, Series=RT
R3 R5 R9 R12 R16 R18 R22 R25 R29 R31 R35 R38 R42 R44 R48 R51: library part CMP-03412-019710-1, "RES 33 OHM 1% 1/2W 1206", Manufacturer=Yageo, Manufacturer Part Number=SR1206FR-7W33RL, Package=SR1206, Power Rating=0.5W, Resistance=33Ω, Temperature="-55°C to +155°C", Temperature Range High=+155°C, Temperature Range Low=-55°C, Tolerance=0.01, Voltage Rating=200V, Automotive=Yes, Automotive Grade="Grade 0", Category=Res, ComponentLink2Description=Datasheet, ComponentLink2URL=http://www.yageo.com/documents/recent/PYu-SR_D_F%20tol_RoHS_L_3.pdf, Composition="Thick Film", Device Class L1="Passive Components", Device Class L2=Resistors, Device Class L3="Chip SMD Resistors", Digikey Description="RES 33 OHM 1% 1/2W 1206", Footprint Url=http://www.yageo.com/exep/pages/download/literatures/PYu-R_Mount_10.pdf, Height=0.65mm, Ipc Land Pattern Name=RESC310160X55, Lead Free=Yes, Octopart=https://octopart.com/sr1206fr-7w33rl-yageo-91137161, RoHS=TRUE, Series=SR
R4 R11 R17 R24 R30 R37 R43 R50: library part CMP-2003-01897-1, Manufacturer="Vishay Dale", Part Number=CRCW12061K69FKEA
R6 R7 R8 R13 R14 R15 R19 R20 R21 R26 R27 R28 R32 R33 R34 R39 R40 R41 R45 R46 R47 R52 R53 R54: library part CMP-03211-001648-1, "Res Thin Film 1206 562Ω 0.1% 0.25W 15ppm/°C Molded SMD", Manufacturer="TE Connectivity", Manufacturer Part Number=RP73D2B562RBTG, Package=RP732B, Power Rating=0.25W, Resistance=562Ω, Temperature="-55°C to 155°C", Temperature Coefficient=15ppm/°C, Temperature Range High=155°C, Temperature Range Low=-55°C, Tolerance=0.1%, Voltage Rating=200V, Automotive=No, Category=Res, ComponentLink2Description=Datasheet, ComponentLink2URL=https://www.te.com/commerce/DocumentDelivery/DDEController?Action=showdoc&DocId=Data+Sheet%7F1773272%7FL%7Fpdf%7FEnglish%7FENG_DS_1773272_L.pdf%7F8-1879255-6, Composition="Thin Film", Device Class L1="Passive Components", Device Class L2=Resistors, Device Class L3="Chip SMD Resistors", Height=0.65mm, Ipc Land Pattern Name=RESC305155X55, Lead Free=Yes, Octopart=https://octopart.com/rp73d2b562rbtg-te+connectivity-42012201, octopart_url=https://octopart.com/rp73d2b562rbtg-te+connectivity-42012201, Packaging="250 cut tape length", RoHS=TRUE, Series=RP73
R10 R23 R36 R49: library part CMP-03412-040887-1, "RES 1Ω ±0.5% 0.063W 0402"
SPI3 "SPI4 Debug DAC": "2.54mm (0.1\") Pitch SIL SMT Pin Header, tin, 4 contacts", Manufacturer_Name=Harwin, Mouser Part Number=855-M20-8770446, Datasheet Link=https://cdn.harwin.com/pdfs/M20-877.pdf, Geometry.Height=10.01mm, Manufacturer_Part_Number=M20-8770446, Mouser Price/Stock=https://www.mouser.co.uk/ProductDetail/Harwin/M20-8770446?qs=ulE8k0yEMYayCK2sgTwMGg%3D%3D
U1 U3 U5 U6 U7 U9 U11 U12: library part CMP-09114-000057-1, "IC ADC DRIVER 8SOIC", Case/Package=SOIC, Input Bias Current=4.5uA, Input Offset Voltage (Vos)=400uV, Input Resistance=24MR, Max Input Voltage=12V, Max Operating Temperature=125°C, Min Input Voltage=2.7V, Min Operating Temperature=-40°C, Nominal Supply Current=2.3mA, Output Current=25mA, Package Quantity=1000, Power Supply Rejection Ratio (PSRR)=87dB, Voltage Gain=6.06dB, -3db Bandwidth=30MHz, Bandwidth=30MHz, Common Mode Rejection Ratio=84dB, Contact Plating=Tin, Gain Bandwidth Product=30MHz, Lead Free="Contains Lead", Max Supply Voltage=12V, Min Supply Voltage=2.7V, Mount="Surface Mount", Number Of Channels=1, Number of Elements=2, Number of Pins=8, Operating Supply Current=2.3mA, Output Current Per Channel=25mA, Packaging="Tape and Reel", Radiation Hardening=No, RoHS Compliant=Yes, Series=-, Settling Time=300ns, Slew Rate=22V/µs, Supply Current=2.3mA, Unity Gain Bandwidth Product=31MHz
U2 U8: library part CMP-06276-000703-1, "IC MCU 32BIT 2MB FLASH 64TQFP", Case/Package=TQFP, Frequency=200MHz, Max Operating Temperature=85°C, Min Operating Temperature=-40°C, Interface=I2C, Memory Size=2MB, Memory Type=FLASH, Mount="Surface Mount", Number of I/Os=46, Oscillator Type=Internal, Packaging=Tray, Peripherals="Brown-out Detect/Reset", RoHS Compliant=Yes, Series="PIC® 32MZ"
U4 U10: library part CMP-0318-01673-2, "Quad 16-Bit nanoDAC+ with SPI Interface and 2 ppm/degC On-Chip Reference, -40 to +105 degC, RU-16, Pb-Free, Tube", Generic Part Number=AD5686R, Manufacturer="Analog Devices", # DAC Outputs=4, Code_JEDEC=MO-153-AB, ComponentLink1Description="Manufacturer URL", ComponentLink1URL=http://www.analog.com/en/index.html, ComponentLink2Description=Datasheet, ComponentLink2URL=http://www.analog.com/static/imported-files/data_sheets/AD5686R_AD5685R_AD5684R.pdf, ComponentLink3Description="Package Specification", ComponentLink3URL=http://www.analog.com/static/imported-files/packages/36244347913743854010197452789RU16.pdf, ComponentLink4Description="Product URL", ComponentLink4URL=http://www.analog.com/en/digital-to-analog-converters/da-converters/ad5686r/products/product.html, DatasheetVersion=Rev.0, Max V+=5.5V, Mounting Technology="Surface Mount", PackageDescription="16-Lead Thin Shrink Small Outline Package [TSSOP]", PackageReference=RU-16, PackageVersion=Nov-2002, Packing=Tube, PartNumber=AD5686RBRUZ, Resolution (Bits)=16, RevisionNote="Component URL fixed", RoHS=Y, Settling Time=5Âµs, Single Supply=Yes

## Via types
v1: diameter 19.68, hole 7.87, Top Layer to Bottom Layer, 8 vias

## Nets (pads, with @x,y where several pads share a name; then routed paths per layer and width w, separated by ;. In a path a pad name is that pad's centre, name@x,y a point inside that pad or via, vN(x,y) a via of type N, cw(c..) or ccw(c..) an arc to the next point about the centre after c; other vN are vias at no path point)
1.2VRef: 1.2VReference.6 U1.2 U3.2 U5.2 U6.2 U7.2 U9.2 U11.2 U12.2
2.5V: 2.5VRegulator.4 2.5VRegulator.5 B1.1 B1.2 B1.6 B1.7 B2.1 B2.2 B2.6 B2.7 B3.1 B3.2 B3.6 B3.7 B4.1 B4.2 B4.6 B4.7 C12.2 C18.2 C24.2 C36.2 C42.2 C53.2 C59.2 C71.2 C77.2 U4.1 U10.1
3.3VInv: C2.1 C4.2 L1.2 R1.2 U1.6 U3.6 U5.6 U6.6 U7.6 U9.6 U11.6 U12.6
3.3VPower: B1.15 B1.20 B2.15 B2.20 B3.15 B3.20 B4.15 B4.20 C13.2 C15.2 C19.2 C23.2 C25.2 C26.2 C29.2 C33.2 C37.2 C38.2 C43.2 C46.2 C50.2 C54.2 C58.2 C60.2 C61.2 C64.2 C68.2 C72.2 C73.2 C78.2 C81.2 Inv3.3V.6 J2.2 J5.2 L2.1 U1.3 U2.8 U2.19 U2.26 U2.39 U2.54 U2.60 U3.3 U4.5 U4.11 U5.3 U6.3 U7.3 U8.8 U8.19 U8.26 U8.39 U8.54 U8.60 U9.3 U10.5 U10.11 U11.3 U12.3
5VPower: 1.1 1.2 1.2VReference.3 1.2VReference.4 C8.2 C9.1 C14.1 J1.1 J3.1 J4.1 J6.1
+12: 1.5 1.8 2.5VRegulator.1 2.5VRegulator.3 3.3VLDO.7 3.3VLDO.8 "Power Input.1" C3.2 C7.2 C10.1 C11.2
GND: 1.2VReference.2 1.4 2.5VRegulator.2 3.3VLDO.2 3.3VLDO.3 3.3VLDO.4 3.3VLDO.5 3.3VLDO.6 3.3VLDO.9 "Power Input.2" B1.5 B1.10 B2.5 B2.10 B3.5 B3.10 B4.5 B4.10 C3.1 C4.1 C5.1 C6.1 C7.1 C8.1 C10.2 C11.1 C12.1 C13.1 C14.2 C15.1 C17.2 C18.1 C19.1 C20.2 C21.2 C22.2 C23.1 C24.1 C25.1 C26.1 C28.2 C29.1 C30.2 C31.2 C32.2 C33.1 C35.2 C36.1 C37.1 C38.1 C39.2 C40.2 C41.2 C42.1 C43.1 C45.2 C46.1 C47.2 C48.2 C49.2 C50.1 C52.2 C53.1 C54.1 C55.2 C56.2 C57.2 C58.1 C59.1 C60.1 C61.1 C63.2 C64.1 C65.2 C66.2 C67.2 C68.1 C70.2 C71.1 C72.1 C73.1 C74.2 C75.2 C76.2 C77.1 C78.1 C80.2 C81.1 C82.2 C83.2 C84.2 Inv3.3V.2 J1.3 J2.3 J3.3 J4.3 J5.3 J6.3 R10.1 R23.1 R36.1 R49.1 U2.7 U2.20 U2.25 U2.35 U2.40 U2.55 U2.59 U4.4 U4.9 U4.10 U4.15 U4.16 U8.7 U8.20 U8.25 U8.35 U8.40 U8.55 U8.59 U10.4 U10.9 U10.10 U10.15 U10.16
  other v1: 25918.23,1634.41 25969.41,1634.41 26020.59,1634.41 26071.77,1634.41 25918.23,1685.59 25969.41,1685.59 26020.59,1685.59 26071.77,1685.59
Net1.2VReference_5: 1.2VReference.5 C6.2
Net1_3: 1.3 C9.2
Net3.3VLDO_1: 3.3VLDO.1 C5.2
NetB1_3: B1.3 C17.1 R3.2
NetB1_4: B1.4 C20.1 R5.2
NetB1_8: B1.8 C28.1 R9.2
NetB1_9: B1.9 C30.1 R12.2
NetB1_11: "SPI1/2 Debug.1" B1.11 B1.16 U2.52
NetB1_12: "SPI1/2 Debug.5" B1.12 U2.42
NetB1_13: "SPI1/2 Debug.2" B1.13 B1.18 U2.49
NetB1_14: "SPI1/2 Debug.4" B1.14 B1.17
NetB1_19: "SPI1/2 Debug.3" B1.19 U2.50
NetB2_3: B2.3 C35.1 R16.2
NetB2_4: B2.4 C39.1 R18.2
NetB2_8: B2.8 C45.1 R22.2
NetB2_9: B2.9 C47.1 R25.2
NetB2_11: B2.11 B2.16 SPI2.1 U2.30
NetB2_12: B2.12 SPI2.5 U2.17
NetB2_13: B2.13 B2.18 SPI2.2 U2.29
NetB2_14: B2.14 B2.17 SPI2.4
NetB2_19: B2.19 SPI2.3 U2.23
NetB3_3: B3.3 C52.1 R29.2
NetB3_4: B3.4 C55.1 R31.2
NetB3_8: B3.8 C63.1 R35.2
NetB3_9: B3.9 C65.1 R38.2
NetB3_11: B3.11 B3.16 SPI1.1 U8.52
NetB3_12: B3.12 SPI1.5 U8.42
NetB3_13: B3.13 B3.18 SPI1.2 U8.49
NetB3_14: B3.14 B3.17 SPI1.4
NetB3_19: B3.19 SPI1.3 U8.50
NetB4_3: B4.3 C70.1 R42.2
NetB4_4: B4.4 C74.1 R44.2
NetB4_8: B4.8 C80.1 R48.2
NetB4_9: B4.9 C82.1 R51.2
NetB4_11: B4.11 B4.16 SPI4.1 U8.30
NetB4_12: B4.12 SPI4.5 U8.17
NetB4_13: B4.13 B4.18 SPI4.2 U8.29
NetB4_14: B4.14 B4.17 SPI4.4
NetB4_19: B4.19 SPI4.3 U8.23
NetC1_1: C1.1 Inv3.3V.1 L2.2
NetC1_2: C1.2 Inv3.3V.5 L1.1
NetC2_2: C2.2 Inv3.3V.3 R1.1 R2.2
NetC16_1: C16.1 R3.1 R4.1 U1.4
NetC16_2: C16.2 R7.2 R8.1
NetC21_1: C21.1 R6.2 R7.1
NetC22_1: C22.1 R8.2 U1.8
NetC27_1: C27.1 R9.1 R11.1 U3.4
NetC27_2: C27.2 R14.2 R15.1
NetC31_1: C31.1 R13.2 R14.1
NetC32_1: C32.1 R15.2 U3.8
NetC34_1: C34.1 R16.1 R17.1 U5.4
NetC34_2: C34.2 R20.2 R21.1
NetC40_1: C40.1 R19.2 R20.1
NetC41_1: C41.1 R21.2 U5.8
NetC44_1: C44.1 R22.1 R24.1 U6.4
NetC44_2: C44.2 R27.2 R28.1
NetC48_1: C48.1 R26.2 R27.1
NetC49_1: C49.1 R28.2 U6.8
NetC51_1: C51.1 R29.1 R30.1 U7.4
NetC51_2: C51.2 R33.2 R34.1
NetC56_1: C56.1 R32.2 R33.1
NetC57_1: C57.1 R34.2 U7.8
NetC62_1: C62.1 R35.1 R37.1 U9.4
NetC62_2: C62.2 R40.2 R41.1
NetC66_1: C66.1 R39.2 R40.1
NetC67_1: C67.1 R41.2 U9.8
NetC69_1: C69.1 R42.1 R43.1 U11.4
NetC69_2: C69.2 R46.2 R47.1
NetC75_1: C75.1 R45.2 R46.1
NetC76_1: C76.1 R47.2 U11.8
NetC79_1: C79.1 R48.1 R50.1 U12.4
NetC79_2: C79.2 R53.2 R54.1
NetC83_1: C83.1 R52.2 R53.1
NetC84_1: C84.1 R54.2 U12.8
"NetDAC Output1_1": "DAC Output1.1" U10.3
"NetDAC Output1_2": "DAC Output1.2" U10.2
"NetDAC Output_1": "DAC Output.1" U4.3
"NetDAC Output_2": "DAC Output.2" U4.2
NetInv3.3V_4: Inv3.3V.4 R2.1
NetJ1_2: J1.2 R6.1
NetJ1_4: J1.4 R10.2 R13.1
NetJ2_1: J2.1 U2.9
NetJ2_4: J2.4 U2.16
NetJ2_5: J2.5 U2.15
NetJ3_2: J3.2 R19.1
NetJ3_4: J3.4 R23.2 R26.1
NetJ4_2: J4.2 R32.1
NetJ4_4: J4.4 R36.2 R39.1
NetJ5_1: J5.1 U8.9
NetJ5_4: J5.4 U8.16
NetJ5_5: J5.5 U8.15
NetJ6_2: J6.2 R45.1
NetJ6_4: J6.4 R49.2 R52.1
NetR4_2: R4.2 U1.1
NetR5_1: R5.1 U1.5
NetR11_2: R11.2 U3.1
NetR12_1: R12.1 U3.5
NetR17_2: R17.2 U5.1
NetR18_1: R18.1 U5.5
NetR24_2: R24.2 U6.1
NetR25_1: R25.1 U6.5
NetR30_2: R30.2 U7.1
NetR31_1: R31.1 U7.5
NetR37_2: R37.2 U9.1
NetR38_1: R38.1 U9.5
NetR43_2: R43.2 U11.1
NetR44_1: R44.1 U11.5
NetR50_2: R50.2 U12.1
NetR51_1: R51.1 U12.5
NetSPI3_1: SPI3.1 U10.8
NetSPI3_2: SPI3.2 U8.43 U10.13
NetSPI3_3: SPI3.3 U8.45 U10.14
NetSPI3_4: SPI3.4 U8.44 U10.12
"NetSPI4 Debug DAC_1": "SPI4 Debug DAC.1" U4.8
"NetSPI4 Debug DAC_2": "SPI4 Debug DAC.2" U2.43 U4.13
"NetSPI4 Debug DAC_3": "SPI4 Debug DAC.3" U2.45 U4.14
"NetSPI4 Debug DAC_4": "SPI4 Debug DAC.4" U2.44 U4.12
pads on no net: 1.2VReference.1 1.6 1.7 "SPI1/2 Debug.6" J2.6 J5.6 SPI1.6 SPI2.6 SPI4.6 U1.7 U2.1 U2.2 U2.3 U2.4 U2.5 U2.6 U2.10 U2.11 U2.12 U2.13 U2.14 U2.18 U2.21 U2.22 U2.24 U2.27 U2.28 U2.31 U2.32 U2.33 U2.34 U2.36 U2.37 U2.38 U2.41 U2.46 U2.47 U2.48 U2.51 U2.53 U2.56 U2.57 U2.58 U2.61 U2.62 U2.63 U2.64 U3.7 U4.6 U4.7 U5.7 U6.7 U7.7 U8.1 U8.2 U8.3 U8.4 U8.5 U8.6 U8.10 U8.11 U8.12 U8.13 U8.14 U8.18 U8.21 U8.22 U8.24 U8.27 U8.28 U8.31 U8.32 U8.33 U8.34 U8.36 U8.37 U8.38 U8.41 U8.46 U8.47 U8.48 U8.51 U8.53 U8.56 U8.57 U8.58 U8.61 U8.62 U8.63 U8.64 U9.7 U10.6 U10.7 U11.7 U12.7